# EAGLE board M_C_ext_main (EAGLE 9.6.2)
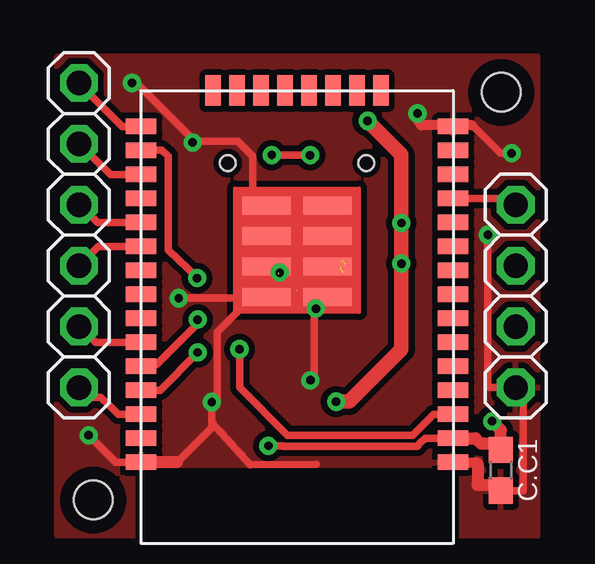
[diagram p0: board, top side]
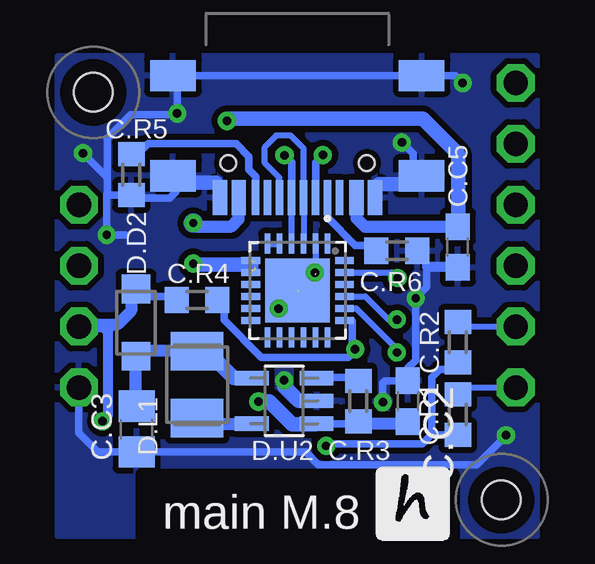
[diagram p1: board, bottom side, seen from below]

No outline drawn. Coordinates in mm, seen from the top.
Copper layers (1*16): Top 0.035mm / dielectric 1.5mm / Bottom 0.035mm
Design rules "default *": minimum track width 10mil, minimum drill 0.35mm, track to track 6mil, track to pad 6mil, pad to pad 6mil, via to via 10mil, smd to smd 10mil, copper to edge 10mil, drill to drill 40mil, minimum pad ring 10mil, minimum via ring 8mil, stop-mask expansion 4mil, vias tented up to drill 0mil, thermal gap 10mil
Holes 1.6 mm at 2,2 19,19
tRestrict: area 18,18 to 20,20; area 1,1 to 3,3
bRestrict: area 1,1 to 3,3; area 18,18 to 20,20

## Footprints (pad centres in the part's own frame; a part is rotated, then mirrored left to right if it is on the bottom)
C0603 = smd 1.1 x 1: 1 -0.85,0; 2 0.85,0
C0805 = smd 1.3 x 1.5: 1 -0.95,0; 2 0.95,0
1X06 = drill 1.016 pad 1.575 octagon: 1 -6.35,0; 2 -3.81,0; 3 -1.27,0; 4 1.27,0; 5 3.81,0; 6 6.35,0
R0603 = smd 1 x 1.1: 1 -0.85,0; 2 0.85,0
TTGO-MICRO-32 = smd 1.27 x 0.635: 3V3 -6.5,5; EN -6.5,4; GND1 -6.5,6; GND2 -6.5,-8; GND3 6.5,6; IO0 6.5,-7; IO2 6.5,-8; IO4 6.5,-6; IO5 6.5,-3; IO12 -6.5,-7; IO14 -6.5,-6; IO16 6.5,-5; IO17 6.5,-4; IO18 6.5,-2; IO19 6.5,-1; IO21 6.5,1; IO22 6.5,4; IO23 6.5,5; IO25 -6.5,-3; IO26 -6.5,-4; IO27 -6.5,-5; IO32 -6.5,-1; IO33 -6.5,-2; IO34 -6.5,1; IO35 -6.5,0; NC 6.5,0; RXD0 6.5,2; TXD0 6.5,3; VN -6.5,2; VP -6.5,3 | smd 0.635 x 1.27: CLK 0.5,-9.5; CMD -0.5,-9.5; IO13 -3.5,-9.5; IO15 3.5,-9.5; SD0 1.5,-9.5; SD1 2.5,-9.5; SD2 -2.5,-9.5; SD3 -1.5,-9.5 | smd 2.032 x 0.762: GND4 -1.27,-0.889; GND5 1.27,-0.889; GND6 -1.27,-2.159; GND7 1.27,-2.159; GND8 -1.27,-3.429; GND9 -1.27,-4.699; GND10 1.27,-3.429; GND11 1.27,-4.699
SHOTKY_2.8 = smd 1.2 x 1.2: A -1.4,0; K 1.4,0
L3230M = smd 1.6 x 2.2: 1 -1.4,0; 2 1.4,0
SOT32-5 = smd 0.6 x 1.4: BP 0.95,1.35; GND 0,-1.35; SHDN 0.95,-1.35; VIN -0.95,-1.35; VOUT -0.95,1.35
1X04 = drill 1.016 pad 1.575 octagon: 1 -3.81,0; 2 -1.27,0; 3 1.27,0; 4 3.81,0
QFN50P400X400X80-25N = smd 0.81 x 0.26: 1 -1.955,1.25; 2 -1.955,0.75; 3 -1.955,0.25; 4 -1.955,-0.25; 5 -1.955,-0.75; 6 -1.955,-1.25; 13 1.955,-1.25; 14 1.955,-0.75; 15 1.955,-0.25; 16 1.955,0.25; 17 1.955,0.75; 18 1.955,1.25 | smd 0.26 x 0.81: 7 -1.25,-1.955; 8 -0.75,-1.955; 9 -0.25,-1.955; 10 0.25,-1.955; 11 0.75,-1.955; 12 1.25,-1.955; 19 1.25,1.955; 20 0.75,1.955; 21 0.25,1.955; 22 -0.25,1.955; 23 -0.75,1.955; 24 -1.25,1.955 | smd 2.68 x 2.68: 25 0,0
USB-C = smd 0.6 x 1.45: A1B12 -3.235,3.825; A4B9 -2.46,3.825; B1A12 3.215,3.825; B4A9 2.44,3.825 | smd 0.3 x 1.45: A5 -1.26,3.825; A6 -0.26,3.825; A7 0.24,3.825; A8 1.24,3.825; B5 1.74,3.825; B6 0.74,3.825; B7 -0.76,3.825; B8 -1.76,3.825 | smd 1.9 x 1.3: SH1 -5.18,2.91; SH2 -5.18,-1.27; SH3 5.18,-1.27; SH4 5.18,2.91 | hole 0.65: 2.88,2.38; -2.9,2.38

## Placement (x,y rotation side)
C.C1  100n  [C0603]  18.98,3.24 270 top
C.C2  4u7  [C0603]  5.89,6.12 270 bottom
C.C3  10u  [C0805]  17.2,4.96 270 bottom
C.C5  4u7  [C0603]  3.81,12.55 90 bottom
C.J2  [1X06]  1.4,13.04 90 top
C.R1  2k2  [R0603]  3.81,5.56 270 bottom
C.R2  2k2  [R0603]  3.81,8.58 270 bottom
C.R3  100k  [R0603]  7.96,6.12 270 bottom
C.R4  100k  [R0603]  14.68,10.34 180 bottom
C.R5  5K1  [R0603]  17.41,15.57 90 bottom
C.R6  5k1  [R0603]  6.35,12.39 180 bottom
C.U1  TTGO-MICRO-32  [TTGO-MICRO-32]  10.49,9.58 180 top
D.D2  SHOTKY_2.8  [SHOTKY_2.8]  17.22,9.4 90 bottom
D.L1  2u2  [L3230M]  14.68,6.81 90 bottom
D.U2  LM3671_3.3  [SOT32-5]  11.05,6.13 90 bottom
JP1  [1X04]  19.6,10.5 270 top
U1  CP2104-F03-GM  [QFN50P400X400X80-25N]  10.49,10.74 270 bottom
U$1  USB-C  [USB-C]  10.5,18.43 180 bottom

## Library data of the parts
C.C1-C.C3 C.C5 = rcl; SPICEPREFIX: C
C.J2 JP1 = pinhead2
C.R1-C.R6 = rcl; SPICEPREFIX: R
C.U1 D.D2 U$1 = hugo
D.L1 = rcl; SPICEPREFIX: L
D.U2 = !stavebnice03
U1 = CP2104; AVAILABILITY: Unavailable; DESCRIPTION: USB Bridge, USB to UART USB 2.0 UART Interface 24-QFN (4x4); MF: Silicon Labs; MP: CP2104; PACKAGE: QFN-24 Silicon Labs; PRICE: None

## Nets
GND: C.C1.2 C.C2.1 C.C3.2 C.C5.1 C.R5.1 C.R6.1 C.U1.GND1 C.U1.GND2 C.U1.GND3 C.U1.GND4 C.U1.GND5 C.U1.GND6 C.U1.GND7 C.U1.GND8 C.U1.GND9 C.U1.GND10 C.U1.GND11 D.U2.GND JP1.4 U1.2 U1.25 U$1.A1B12 U$1.B1A12 U$1.SH1 U$1.SH2 U$1.SH3 U$1.SH4
N$1: U1.4 U$1.A7 U$1.B7
N$2: U1.3 U$1.A6 U$1.B6
N$3: C.R6.2 U$1.A5
N$4: C.R5.2 U$1.B5
N$5: C.C3.1 D.D2.A D.L1.2 D.U2.BP
N$6: C.J2.6 C.U1.IO2
N$8: U1.5 U1.6
N$10: D.L1.1 D.U2.VOUT
N$11: C.R3.1 D.U2.SHDN
N$12: C.J2.5 C.U1.IO4
N$13: C.J2.4 C.U1.IO17
N$14: C.J2.3 C.U1.IO5
N$15: C.U1.IO27 JP1.1
PROG: C.U1.IO0 U1.23
RESET: C.R4.1 C.U1.EN U1.19
RX: C.U1.TXD0 U1.20
SCL: C.J2.1 C.R1.1 C.U1.IO22
SDA: C.J2.2 C.R2.1 C.U1.IO21
TX: C.U1.RXD0 U1.21
VCC: C.C1.1 C.R1.2 C.R2.2 C.R4.2 C.U1.3V3 D.D2.K JP1.3
VUSB: C.C2.2 C.C5.2 C.R3.2 D.U2.VIN U1.7 U1.8 U$1.A4B9 U$1.B4A9

## Tracks (layer width: path | path; a pad name or v marks a point on that pad's centre or on a via)
GND  (via drill 0.35)  (2 unrouted)
  Top 0.254: 18.17,17.24 17.79,17.63 | 9.17,10.21 9.42,10.46 9.8,10.84 10.24,10.84 10.47,10.84 11.1,10.21 | v11.05,6.99 11.2,7.14
  Top 0.305: 15.65,17.63 15.51,17.77 v15.51,18.12 15.51,17.97 | 16.94,17.63 C.U1.GND2 | v6.93,6.08 6.93,5.01 5.5,3.57 | C.U1.GND3 2.93,3.57 v1.8,4.7 | 6.23,17 v6.14,16.91 | v6.14,16.91 6.14,17.04 3.81,19.38 v3.61,19.39 | C.C1.2 19.91,2.39 19.91,6.38 JP1.4 18.51,6.69 18.44,6.76 v18.44,13.06 | 17.53,3.58 C.U1.GND1 16.88,3.46 16.85,3.46 16.75,3.57 | 11.29,3.48 8.55,3.47 6.93,5.24 v6.93,6.08 | v6.14,16.91 6.21,16.97 8.01,16.97 8.65,16.33 8.65,14.79 9.73,13.71 9.73,12.76 9.73,11.57 | 9.73,11.57 9.73,11.43 9.73,10.13 11.2,11.6 11.2,7.14 | 12.32,10.26 11.15,10.26 11.1,10.21 9.17,10.21 | 9.42,10.46 C.U1.GND5 | 10.9,7.18 v11.05,6.99 | 9.73,11.57 7.17,9.01 7.17,6.08 v6.93,6.08 | v19.43,16.46 18.95,16.46 17.79,17.63 | v5.56,10.41 9.81,10.41 10.24,10.84 | 18.01,3.52 17.95,3.58
  Top 0.406: 15.65,17.63 16.94,17.63 17.79,17.63 | C.U1.GND1 17.95,3.58
  Top 0.508: 5.5,3.57 C.U1.GND3 | C.C1.2 18.75,2.62 18.01,2.62 18.01,3.52 | C.U1.GND1 16.95,3.61 | C.U1.GND10 9.48,13.01 9.73,12.76 | C.U1.GND7 9.42,11.73 9.73,11.43
  Bottom 0.254: 15.51,15.57 U$1.SH4 | D.U2.GND 9.73,6.17 | U1.2 9.74,11.48 v9.77,11.48 9.75,11.46 9.75,11.41 | C.C5.1 3.87,11.73 | 5.1,11.73 C.R6.1 5.52,12.31 | U1.25 10.13,11.1 9.86,11.1
  Bottom 0.305: 15.49,18.12 v15.51,18.12 | U$1.A1B12 7.26,15.01 7.24,15.01 | 7.09,15.18 7.09,15.01 7.24,15.01 | 7.24,15.01 7.24,14.82 | v6.14,16.91 5.68,16.44 5.68,15.4 | v15.51,18.12 15.51,19.65 U$1.SH3 U$1.SH2 3.92,19.7 v3.61,19.39 | 15.32,15.52 U$1.SH4 | U$1.SH4 15.29,15.52 15.01,15.24 | U$1.SH1 5.76,15.18 | 10.7,10.94 U1.25 | 9.71,11.46 10.46,10.71 | v15.51,18.12 15.56,18.07 17.44,18.07 18.42,17.09 18.42,15.62 18.5,15.53 | C.C5.1 3.72,11.7 3.65,11.63 | U$1.B1A12 13.71,15.05 13.9,15.24 | 18.41,14.73 18.41,15.44 | 18.41,15.44 18.41,15.65 | 18.41,15.44 18.5,15.53 | 18.5,15.53 v19.43,16.46 | 9.74,11.22 9.86,11.1 | v6.93,6.08 6.93,6.89 6.85,6.97 C.C2.1 5.89,7.5 5.57,7.83 v5.57,10.41 v5.56,10.41 5.1,10.88 5.1,11.73 | 18.41,14.73 18.4,14.71 C.R5.1 17.29,14.59 15.81,14.59 15.56,14.84 U$1.SH4 | 18.41,14.73 18.44,14.76 v18.44,13.06 17.65,13.06 | JP1.4 19.6,4.8 18.81,4.01 C.C3.2 10.16,4.01 9.62,3.47 3.03,3.47 v1.8,4.7
  Bottom 0.406: 5.1,11.73 3.87,11.73
  Bottom 0.508: U1.25 10.53,10.74 11.1,10.21
  Bottom 0.61: 13.9,15.24 15.01,15.24 | 5.76,15.18 7.09,15.18 | D.U2.GND 10.43,6.13 11.05,6.75 v11.05,6.99
  other vias: 11.28,9.98
  pour Top (isolate 0.254): 0.5,0.5 0.5,20.5 20.5,20.5 20.5,0.5
  pour Bottom (isolate 0.254): 0.5,20.5 20.5,20.5 20.5,0.5 0.5,0.5
N$1  (via drill 0.35)
  Top 0.305: v11.04,16.38 v11.03,16.38 v9.43,16.38
  Bottom 0.254: U$1.A7 U1.4
  Bottom 0.305: U$1.A7 10.74,16.08 v11.04,16.38 | v9.43,16.38 9.74,16.08 U$1.B7
N$2
  Bottom 0.254: U1.3 10.24,12.7 U$1.A6 10.24,16.66 10.78,17.19 11.38,17.19 11.85,16.72 11.85,16.04 11.25,15.44 11.25,14.61 U$1.B6
N$3
  Bottom 0.254: 7.52,12.61 C.R6.2
  Bottom 0.305: U$1.A5 9.24,13.77 8.09,12.62 7.43,12.62 C.R6.2
N$4
  Bottom 0.305: U$1.B5 12.24,15.49 12.51,15.77 12.51,16.32 13.05,16.86 16.72,16.86 17.16,16.41 C.R5.2
N$5
  Bottom 0.508: D.L1.2 17.01,8.21 D.D2.A 17.22,5.94 C.C3.1
  Bottom 0.61: D.U2.BP 12.41,7.09 13.15,7.09 14.27,8.21 D.L1.2 14.73,8.15 | 14.93,7.95 14.73,8.15 | 14.79,8.21 14.73,8.15
N$6
  Top 0.305: C.U1.IO2 3.21,17.58 C.J2.6
N$8
  Bottom 0.254: U1.6 11.71,12.67 11.37,12.67 11.27,12.67 U1.5
N$10
  Bottom 0.305: 12.43,5.18 D.U2.VOUT | D.L1.1 14.44,5.17
  Bottom 0.508: D.U2.VOUT 12.41,5.17 14.44,5.17
N$11
  Bottom 0.305: D.U2.SHDN 9.68,7.1 8.09,7.1 C.R3.1
N$12
  Top 0.305: C.U1.IO4 2.72,15.58 C.J2.5
N$13
  Top 0.305: C.U1.IO17 2.18,13.58 C.J2.4
N$14
  Top 0.305: C.U1.IO5 2.21,12.58 C.J2.3
N$15
  Top 0.305: C.U1.IO27 19.33,14.58 JP1.1
PROG  (via drill 0.35)
  Top 0.305: C.U1.IO0 4.32,16.58 4.33,16.59 4.86,16.59 5.12,16.33 5.12,12.42 6.32,11.27 v6.33,11.25
  Bottom 0.254: U1.23 6.56,11.49 v6.33,11.25
RESET  (via drill 0.35)
  Top 0.305: C.U1.EN 16.19,5.58 15.31,4.7 10.08,4.7 8.09,6.68 v8.09,8.29
  Bottom 0.254: U1.19 8.51,9.46 8.22,9.46
  Bottom 0.305: 8.22,9.46 8.22,8.41 v8.09,8.29 8.09,8.23 8.38,7.95 12,7.95 13.55,9.5 13.55,10.06 C.R4.1
RX  (via drill 0.35)
  Top 0.305: C.U1.TXD0 4.01,6.56 4.79,6.56 v6.35,8.15
  Bottom 0.254: U1.20 8.05,9.99 6.35,8.29 v6.35,8.15
SCL
  Top 0.305: C.U1.IO22 3.04,5.58 2.69,5.93 2.31,6.28 1.81,6.28 C.J2.1
  Bottom 0.254: C.R1.1 3.53,6.69 C.J2.1
SDA
  Top 0.305: C.U1.IO21 2.1,8.58 C.J2.2
  Bottom 0.254: C.R2.1 3.6,9.43 3.41,9.23 C.J2.2
TX  (via drill 0.35)
  Top 0.305: C.U1.RXD0 4.06,7.65 4.65,7.65 6.35,9.35 v6.35,9.52
  Bottom 0.254: U1.21 7.67,10.49 6.71,9.52 v6.35,9.52
VCC  (via drill 0.35)
  Top 0.305: C.U1.3V3 15.83,4.58 15.63,4.37 15.49,4.24 9.89,4.24 9.87,4.26 v9.3,4.26
  Top 0.406: 17,4.56 C.U1.3V3 | 18.6,5.28 v18.62,5.28
  Top 0.508: 18.62,5.25 v18.62,5.28 18.98,4.92 C.C1.1 18.73,4.34 18.16,4.34 17.92,4.58 C.U1.3V3
  Bottom 0.254: 3.98,4.38 C.R1.2 | 4.01,7.72 C.R2.2
  Bottom 0.305: C.R1.2 4.93,4.71 | 4.93,4.71 5.3,4.34 9.21,4.34 v9.3,4.26 | 4.93,4.71 4.89,4.74 4.89,7.11 4.56,7.45 4.09,7.45 C.R2.2 | C.R4.2 15.42,10.22 | C.R4.2 15.53,10.29 | C.R4.2 15.77,10.58 | C.R4.2 15.68,10.34 15.81,10.46 | C.R4.2 15.69,10.49 16.92,10.49 D.D2.K
  Bottom 0.406: 18.41,9.08 18.41,5.49 v18.62,5.28
  Bottom 0.508: v18.61,5.27 v18.62,5.28 18.62,5.31 | 18.41,9.08 18.56,9.23 JP1.3 19.5,9.32 17.98,9.32 17.42,9.88 17.42,10.6 D.D2.K
  Bottom 0.61: v18.62,5.28 v18.61,5.28
VUSB  (via drill 0.35)  (4 unrouted)
  Top 0.61: v13.43,17.81 13.43,17.79 14.83,16.39 v14.83,13.55 v14.83,11.86 14.83,8.28 12.65,6.1 v12.12,6.1
  Bottom 0.254: 12.26,11.66 12.89,11.66
  Bottom 0.305: 12.28,11.71 12.28,11.95 | D.U2.VIN 8.05,5.18 C.R3.2
  Bottom 0.508: C.C5.2 7.68,13.39 8.04,13.75 U$1.A4B9 | v14.83,13.55 14.83,13.54 14.71,13.41 13.24,13.41 12.94,13.71 U$1.B4A9 | C.C2.2 5.97,5.19 7.88,5.19 C.R3.2
  Bottom 0.61: v14.83,13.55 14.84,13.56 | v13.43,17.81 13.34,17.9 5.28,17.9 3.8,16.42 3.8,13.5 C.C5.2 | v14.83,11.86 14.79,11.81 12.5,11.81 | D.U2.VIN 9.73,5.15 10.71,5.15 11.67,6.1 v12.12,6.1
  Bottom 0.813: v14.83,13.55 v14.84,13.55

## Text on the board
bPlace: main M.8